# Altium PCB Main.PcbDoc
Units mil, origin at the board's own origin, x right, y up, seen from the top; angles counter-clockwise.
Board outline 2306.85 x 2461.6 mil, 2 copper layers (Top Layer, Bottom Layer); 62 components, 47 nets, 276 pads, 49 vias.
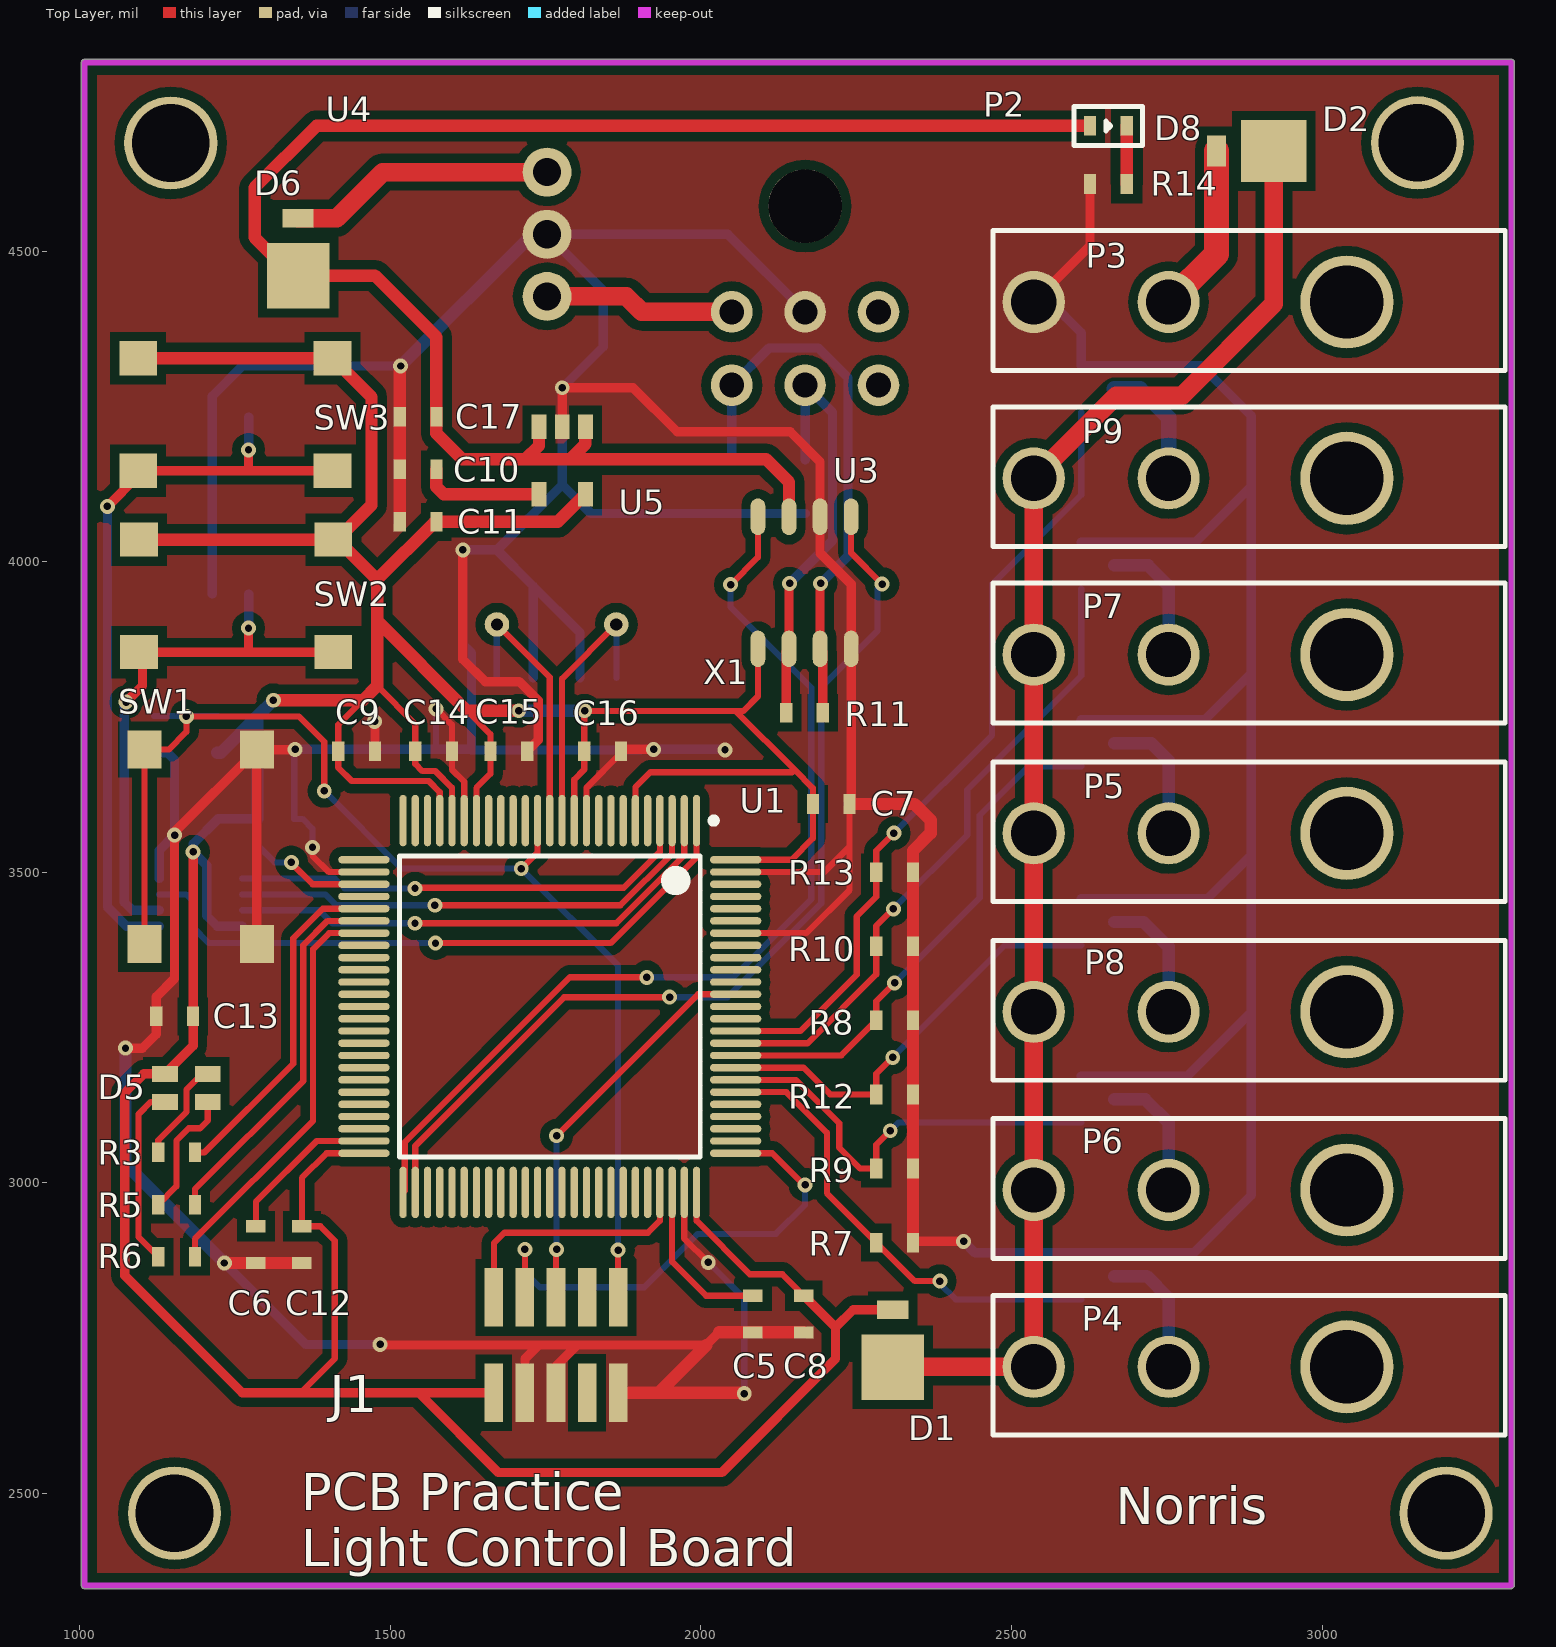
[diagram p0: Top Layer view]
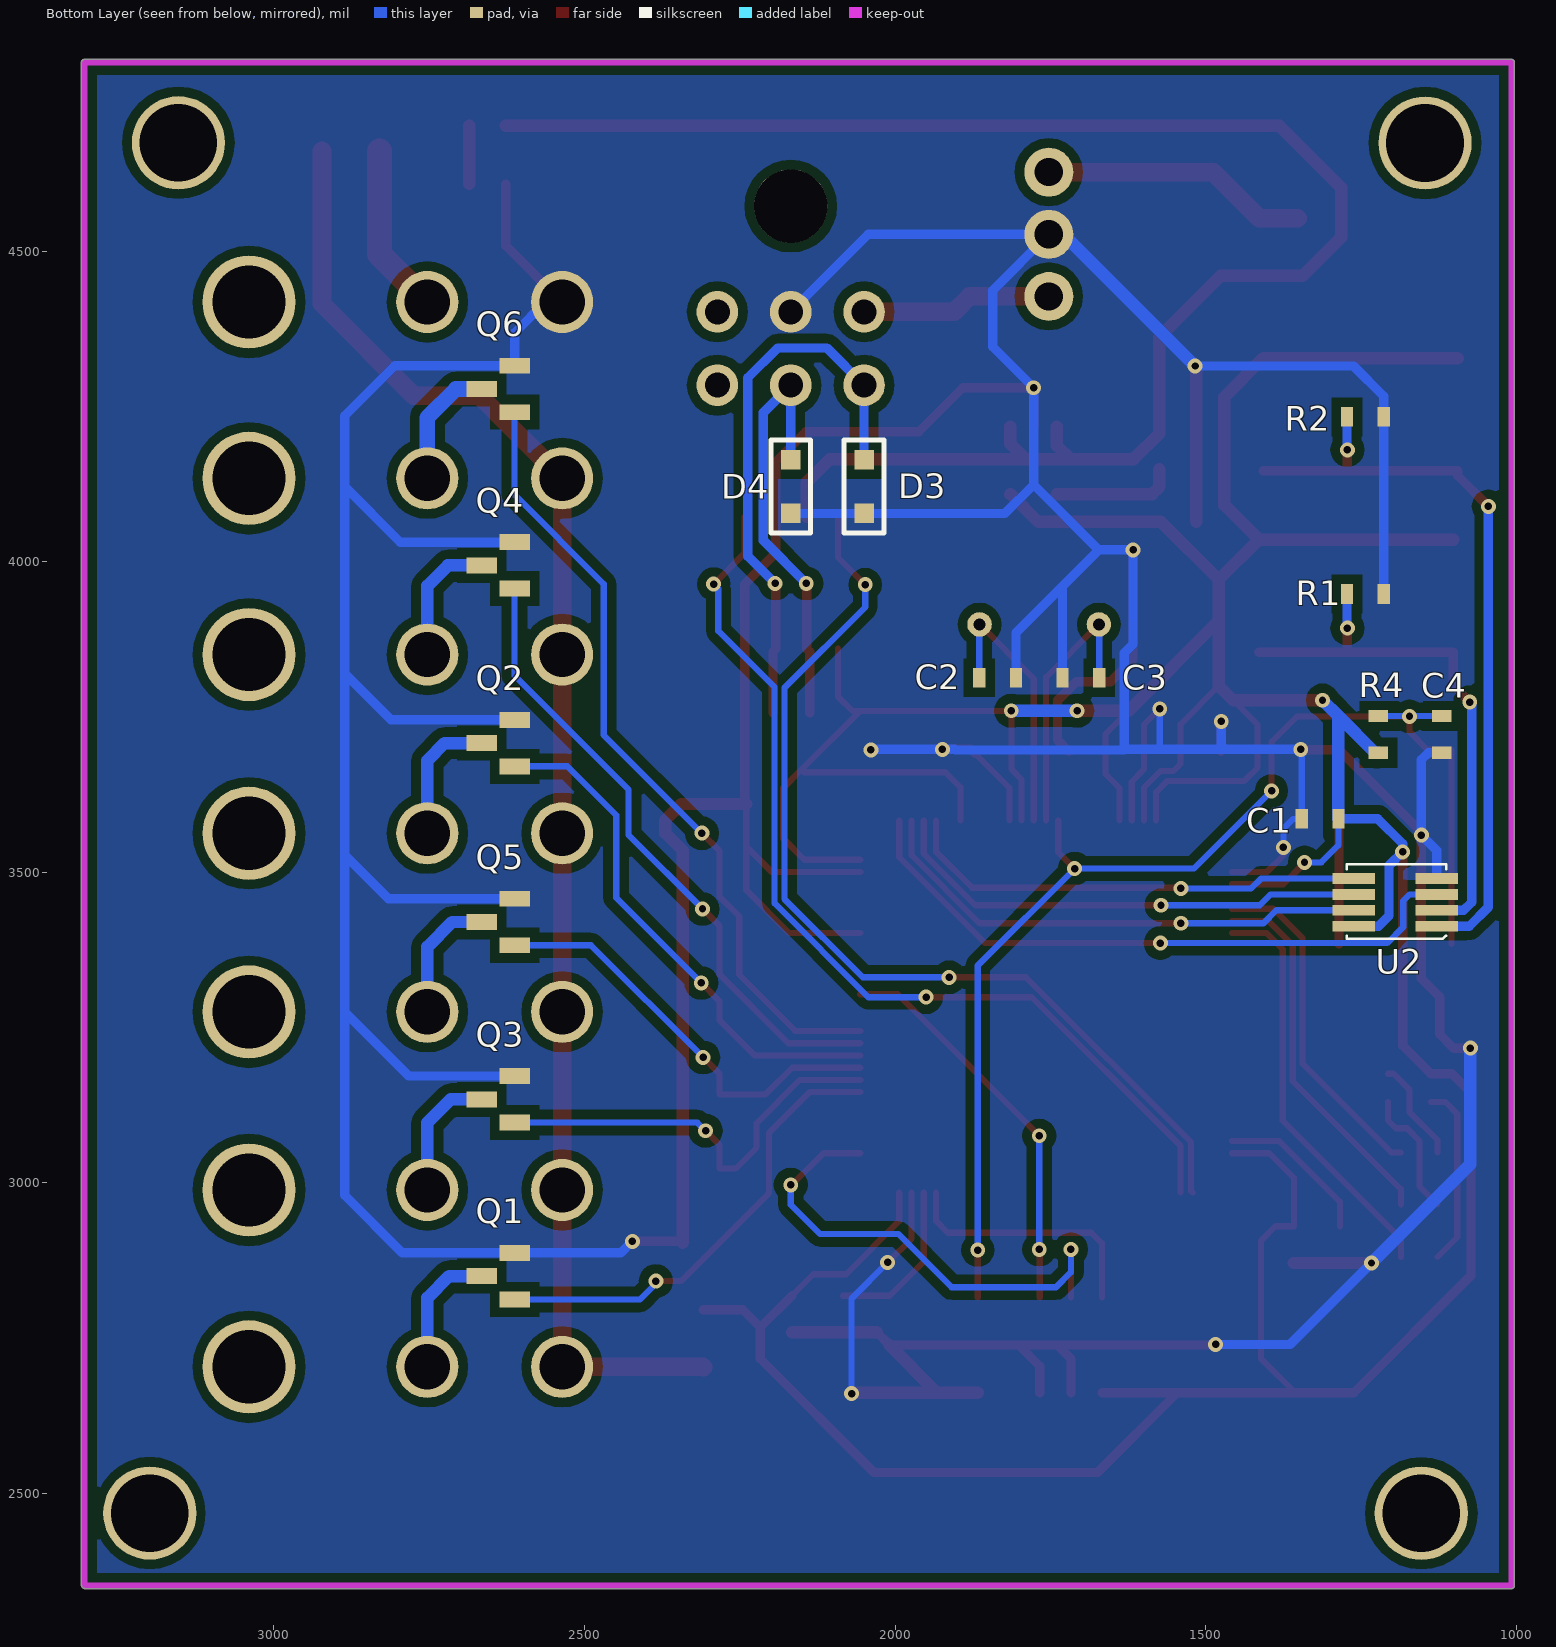
[diagram p1: Bottom Layer view, seen from below]

## Layer stack, top to bottom
Top Solder: solder mask 0.4, Solder Resist, Dk 3.5
Top Layer: signal copper 1.4
Dielectric 1: dielectric 12.6, FR-4, Dk 4.8
Bottom Layer: signal copper 1.4
Bottom Solder: solder mask 0.4, Solder Resist, Dk 3.5

## Board outline
1008,2346.97 cw(c1008,2351.99) 1003.01,2352.49 cw(c1008,2353) 1002.99,2353 1002.99,4803.56 cw(c1008,4803.56) 1008,4808.58 3304.82,4808.58 cw(c3304.82,4803.56) 3309.84,4803.56 3309.84,2352.82 cw(c3304.82,2352.82) 3307.93,2348.88 cw(c3303.99,2351.99) 3303.99,2346.97

## Design rules (kind name [scope] priority, off if disabled: settings)
Clearance [All] p1: gap=6 ignorepadtopadclearanceinfootprint=FALSE
DiffPairsRouting [All] p1: maxlimit=10 minlimit=10 mostfreqgap=10 toplayer_minwidth=15 toplayer_maxwidth=15 toplayer_prefwidth=15 bottomlayer_minwidth=15 bottomlayer_maxwidth=15 bottomlayer_prefwidth=15 maxuncoupledlength=500
PlaneConnect [All] p1: planeconnectstyle=Direct reliefexpansion=20 reliefentries=4 reliefconductorwidth=10 reliefairgap=10
PolygonConnect [All] p1: connectstyle=Direct reliefconductorwidth=10 reliefentries=4 polygonreliefangle="90 Angle" airgapwidth=10
RoutingVias [All] p1: holewidth=12 width=24 viastyle="Through Hole" minholewidth=10 minwidth=20 maxholewidth=20 maxwidth=30
SolderMaskExpansion [All] p1: expansion=4
Width [All] p1: maxlimit=40 minlimit=6 preferedwidth=10
28 further rules are at their usual default settings.

## Classes and differential pairs
component class Connectors: D1 D2 D3 D4 J1 P2 P3 P4 P5 P6 P7 P8 P9
component class MCU: C1 C2 C3 C4 C5 C6 D5 R1 R2 R3 R4 R5 R6 SW1 SW2 SW3 U1 U2 X1
component class Other: Q1 Q2 Q3 Q4 Q5 Q6 R7 R8 R9 R10 R11 R12 R13 U3
component class Power: C7 C8 C9 C10 C11 C12 C13 C14 C15 C16 C17 D6 D8 R14 U4 U5
differential pair CAN2: +CAN2_P -CAN2_N

## Components (designator, comment, footprint, x,y, rotation, side; value= is the part's Value field where it differs from the comment)
C1 "SCH_GENERIC_CAPACITOR_0603" PCB_GENERIC_SMD_0603 1316,3586 r0 bottom
C2 "SCH_GENERIC_CAPACITOR_0603" PCB_GENERIC_SMD_0603 1835,3813 r0 bottom
C3 "SCH_GENERIC_CAPACITOR_0603" PCB_GENERIC_SMD_0603 1701,3813 r180 bottom
C4 "SCH_GENERIC_CAPACITOR_0603" PCB_GENERIC_SMD_0603 1120,3722 r270 bottom
C5 "SCH_GENERIC_CAPACITOR_0603" PCB_GENERIC_SMD_0603 2084,2789 r90 top
C6 "SCH_GENERIC_CAPACITOR_0603" PCB_GENERIC_SMD_0603 1284,2900.68 r90 top
C7 "C060-0001U-00" PCB_GENERIC_SMD_0603 2210,3610 r180 top value=0.33uF
C8 "C060-0001U-00" PCB_GENERIC_SMD_0603 2166,2789 r90 top value=0.33uF
C9 "C060-0001U-00" PCB_GENERIC_SMD_0603 1446,3695 r180 top value=0.33uF
C10 "C060-0001U-00" PCB_GENERIC_SMD_0603 1544.94,4148.57 r0 top value=10nF
C11 "C060-0001U-00" PCB_GENERIC_SMD_0603 1544.94,4064 r0 top value=10uF
C12 "C060-0001U-00" PCB_GENERIC_SMD_0603 1358,2900.68 r90 top value=0.33uF
C13 "C060-0001U-00" PCB_GENERIC_SMD_0603 1153,3268 r180 top value=1uF
C14 "C060-0001U-00" PCB_GENERIC_SMD_0603 1570,3695 r0 top value=1uF
C15 "C060-0001U-00" PCB_GENERIC_SMD_0603 1691,3695 r180 top value=0.33uF
C16 "C060-0001U-00" PCB_GENERIC_SMD_0603 1842,3695 r180 top value=0.33uF
C17 "C060-0001U-00" PCB_GENERIC_SMD_0603 1544.94,4233.15 r0 top value=0.1uF
D1 "Schottky Diode" "ON Semi Schottky Diode - MBRM110LT1G" 2309,2731 r90 top
D2 "Schottky Diode" "ON Semi Schottky Diode - MBRM110LT1G" 2895,4661 r180 top
D3 "TVS Diode" "TVS Diode" 2050,4121 r180 bottom
D4 "TVS Diode" "TVS Diode" 2168,4121 r180 bottom
D5 "D0S4-000CR-00" CLMVB-FKA 1172,3153 r0 top
D6 "Schottky Diode" "ON Semi Schottky Diode - MBRM110LT1G" 1352,4488 r90 top
D8 "Red LED" SMD_0603_LED 2656,4703.32 r0 top
J1 "SMT, shrouded" CONN-50mil-10POS-SMD 1767,2739 r90 top
P2 "SCH_MLX_MICROFIT_3X2" PCB_MLX_MICROFIT_3X2 2168,4501.01 r0 top
P3 "Molex Mini-Fit 1x2" "Molex Mini-Fit Jr 2x1" 3040,4418 r90 top
P4 "Molex Mini-Fit 1x2" "Molex Mini-Fit Jr 2x1" 3040,2704 r90 top
P5 "Molex Mini-Fit 1x2" "Molex Mini-Fit Jr 2x1" 3040,3562.83 r90 top
P6 "Molex Mini-Fit 1x2" "Molex Mini-Fit Jr 2x1" 3040,2988.67 r90 top
P7 "Molex Mini-Fit 1x2" "Molex Mini-Fit Jr 2x1" 3040,3850.5 r90 top
P8 "Molex Mini-Fit 1x2" "Molex Mini-Fit Jr 2x1" 3040,3275.33 r90 top
P9 "Molex Mini-Fit 1x2" "Molex Mini-Fit Jr 2x1" 3040,4134.17 r90 top
Q1 "NMOS" "NMOS - SSM3K333R - SOTFL95P180X88-3M" 2639,2850 r0 bottom
Q2 "NMOS" "NMOS - SSM3K333R - SOTFL95P180X88-3M" 2639,3708 r0 bottom
Q3 "NMOS" "NMOS - SSM3K333R - SOTFL95P180X88-3M" 2639,3134.6 r0 bottom
Q4 "NMOS" "NMOS - SSM3K333R - SOTFL95P180X88-3M" 2639,3994 r0 bottom
Q5 "NMOS" "NMOS - SSM3K333R - SOTFL95P180X88-3M" 2639,3420 r0 bottom
Q6 "NMOS" "NMOS - SSM3K333R - SOTFL95P180X88-3M" 2639,4278 r0 bottom
R1 "SCH_GENERIC_RESISTOR_0603" PCB_GENERIC_SMD_0603 1243,3948 r0 bottom
R2 "SCH_GENERIC_RESISTOR_0603" PCB_GENERIC_SMD_0603 1243,4233 r180 bottom
R3 "SCH_GENERIC_RESISTOR_0603" PCB_GENERIC_SMD_0603 1156.32,3049.21 r180 top
R4 "SCH_GENERIC_RESISTOR_0603" PCB_GENERIC_SMD_0603 1222,3722 r270 bottom
R5 "SCH_GENERIC_RESISTOR_0603" PCB_GENERIC_SMD_0603 1156.32,2965.11 r180 top
R6 "SCH_GENERIC_RESISTOR_0603" PCB_GENERIC_SMD_0603 1156.32,2881 r180 top
R7 "SCH_GENERIC_RESISTOR_0603" PCB_GENERIC_SMD_0603 2312.16,2904 r0 top
R8 "SCH_GENERIC_RESISTOR_0603" PCB_GENERIC_SMD_0603 2312.16,3261.6 r0 top
R9 "SCH_GENERIC_RESISTOR_0603" PCB_GENERIC_SMD_0603 2312.16,3023.2 r0 top
R10 "SCH_GENERIC_RESISTOR_0603" PCB_GENERIC_SMD_0603 2312.16,3380.8 r0 top
R11 "SCH_GENERIC_RESISTOR_0603" PCB_GENERIC_SMD_0603 2167,3757 r0 top
R12 "SCH_GENERIC_RESISTOR_0603" PCB_GENERIC_SMD_0603 2312.16,3142.4 r0 top
R13 "SCH_GENERIC_RESISTOR_0603" PCB_GENERIC_SMD_0603 2312.16,3500 r0 top
R14 "SCH_GENERIC_RESISTOR_0603" PCB_GENERIC_SMD_0603 2656,4608 r180 top
SW1 "Tactile Switch" "C&K 4 pin Tactile Switch" 1195,3541 r90 top
SW2 "Tactile Switch" "C&K 4 pin Tactile Switch" 1252,3945 r0 top
SW3 "Tactile Switch" "C&K 4 pin Tactile Switch" 1251,4237 r180 top
U1 "STM32F407VGT6" STM-LQFP100_M 1757,3284 r270 top
U2 "SN74LVC1G139" demux_24 1128.14,3413.23 r0 bottom
U3 "SN65HVD1050DR" SOIC127P600X175-8N 2167,3966 r270 top
U4 "R78E-1.0 DC/DC" R78-1.0 1664,4527 r90 top
U5 "3.3V LDO" SOT95P280X145-5N 1777,4163 r270 top
X1 "XTAL" CRYSTAL_8MHZ 1768,3899 r180 top

## Footprints (in the part's own frame and the unit in brackets; to place one, negate y for a bottom-side part, rotate by r counter-clockwise, add the part's x,y. Pads: shape width x height; smd on the part's side, far side on the other; paste and mask are expansions set on the pad)
"C&K 4 pin Tactile Switch" [mm] "4 Pin Tactile Switch, SMT"
  rect 1.55x1.4 smd mask+0.1: 1(-3.975,2.3)
  rect 1.55x1.4 smd: 2(3.975,2.3) 3(-3.975,-2.3) 4(3.975,-2.3)
  body extent -4.47,-3.02 4.53,2.98, height 5
CLMVB-FKA [mm] "LED RGB DIFFUSED 4SMD"
  rect 1.05x0.65 smd: 1(-0.875,0.575) 2(0.875,0.575) 3(0.875,-0.575) 4(-0.875,-0.575)
  body extent -1,-1 1,1, height 1
CONN-50mil-10POS-SMD [mm] "50mil 10POS 2ROW SMT HEADER"
  rect 2.4x0.76 smd: 1(-1.95,2.54) 2(1.95,2.54) 3(-1.95,1.27) 4(1.95,1.27) 5(-1.95,0) 6(1.95,0) 7(-1.95,-1.27) 8(1.95,-1.27) 9(-1.95,-2.54) 10(1.95,-2.54)
  body extent -2.75,-6.33 2.75,6.32, height 5.57
CRYSTAL_8MHZ [mm] "631-1100-ND"
  round 1 hole 0.5: 1(-2.44,0) 2(2.44,0)
  body extent -5.75,-2.5 5.75,2.5, height 3.55
demux_24 [mm] "SN74LVC1G139DCTR"
  rect 1.74x0.44 smd: 1(0,0) 2(0,-0.65) 3(0,-1.3) 4(0,-1.95) 5(3.4,-1.95) 6(3.4,-1.3) 7(3.4,-0.65) 8(3.4,0)
  silkscreen extent -0.38,-2.54 3.68,0.51, body extent -0.36,-2.49 3.66,0.46, height 0.91
"Molex Mini-Fit Jr 2x1" [mil]
  round 100 hole 73: 1(0,287) 2(0,504)
  round 150 hole 118: ""(0,0)
  silkscreen extent -110,-255 115,570, body extent -111,-260 117,525, height 449
"NMOS - SSM3K333R - SOTFL95P180X88-3M" [mm] "SOTFL, 3-Leads, Body 2.90x1.80mm, Pitch 0.95mm, IPC Low Density"
  rect 1.25x0.65 smd: 1(-0.675,0.95) 2(-0.675,-0.95) 3(0.675,0)
  body extent -0.95,-1.55 0.95,1.55, height 0.88
"ON Semi Schottky Diode - MBRM110LT1G" [mil]
  rect 105.12x100 smd: 1(-27.56,0)
  rect 30x50 smd: 2(64.94,0)
  body extent -78,-65 37,65, height 40
PCB_GENERIC_SMD_0603 [mm]
  rect 0.5x0.8 smd: 1(-0.75,0) 2(0.75,0)
  body extent -0.75,-0.5 0.75,0.5, height 0.45
PCB_MLX_MICROFIT_3X2 [mm]
  round 1.7 hole 1.02: 1(-3,-2.51) 2(0,-2.51) 3(3,-2.51) 4(-3,-5.51) 5(0,-5.51) 6(3,-5.51)
  round 3 hole 3 unplated: ""(0,1.81)
  body extent -6.58,-5.78 6.57,6.46, height 8.83
R78-1.0 [mm]
  round 2 hole 1.15: 1(-2.54,-2.25) 2(0,-2.25) 3(2.54,-2.25)
  body extent -5.8,-4.25 5.8,4.25, height 10.4
SMD_0603_LED [mm]
  rect 0.5x0.8 smd: 1(-0.747,-0.047) 2(0.753,-0.047)
  silkscreen extent -1.4,-0.85 1.4,0.75, body extent -0.75,-0.55 0.75,0.45, height 0.45
SOIC127P600X175-8N [mm] "SOIC, 8-Leads, Body 4.90x3.90mm, Pitch 1.27mm, IPC Medium Density"
  oval 1.5x0.6 smd: 1(-2.7,1.905) 2(-2.7,0.635) 3(-2.7,-0.635) 4(-2.7,-1.905) 5(2.7,-1.905) 6(2.7,-0.635) 7(2.7,0.635) 8(2.7,1.905)
  body extent -3,-2.45 3,2.45, height 1.75
SOT95P280X145-5N [mm] "SOT23, 5-Leads, Body 2.90x2.80mm, Pitch 0.95mm, IPC Medium Density"
  rect 1x0.6 smd: 1(-1.375,0.95) 2(-1.375,0) 3(-1.375,-0.95) 4(1.375,-0.95) 5(1.375,0.95)
  body extent -1.5,-1.53 1.5,1.53, height 1.45
STM-LQFP100_M [mm] "Thin QFP, 100-Leads, Body 14x14mm, Pitch 0.5mm, IPC Low Density"
  oval 2.1x0.3 smd: 1(-7.6,6) 2(-7.6,5.5) 3(-7.6,5) 4(-7.6,4.5) 5(-7.6,4) 6(-7.6,3.5) 7(-7.6,3) 8(-7.6,2.5) 9(-7.6,2) 10(-7.6,1.5) 11(-7.6,1) 12(-7.6,0.5) 13(-7.6,0) 14(-7.6,-0.5) 15(-7.6,-1) 16(-7.6,-1.5) 17(-7.6,-2) 18(-7.6,-2.5) 19(-7.6,-3) 20(-7.6,-3.5) 21(-7.6,-4) 22(-7.6,-4.5) 23(-7.6,-5) 24(-7.6,-5.5) 25(-7.6,-6) 51(7.6,-6) 52(7.6,-5.5) 53(7.6,-5) 54(7.6,-4.5) 55(7.6,-4) 56(7.6,-3.5) 57(7.6,-3) 58(7.6,-2.5) 59(7.6,-2) 60(7.6,-1.5) 61(7.6,-1) 62(7.6,-0.5) 63(7.6,0) 64(7.6,0.5) 65(7.6,1) 66(7.6,1.5) 67(7.6,2) 68(7.6,2.5) 69(7.6,3) 70(7.6,3.5) 71(7.6,4) 72(7.6,4.5) 73(7.6,5) 74(7.6,5.5) 75(7.6,6)
  oval 0.3x2.1 smd: 26(-6,-7.6) 27(-5.5,-7.6) 28(-5,-7.6) 29(-4.5,-7.6) 30(-4,-7.6) 31(-3.5,-7.6) 32(-3,-7.6) 33(-2.5,-7.6) 34(-2,-7.6) 35(-1.5,-7.6) 36(-1,-7.6) 37(-0.5,-7.6) 38(0,-7.6) 39(0.5,-7.6) 40(1,-7.6) 41(1.5,-7.6) 42(2,-7.6) 43(2.5,-7.6) 44(3,-7.6) 45(3.5,-7.6) 46(4,-7.6) 47(4.5,-7.6) 48(5,-7.6) 49(5.5,-7.6) 50(6,-7.6) 76(6,7.6) 77(5.5,7.6) 78(5,7.6) 79(4.5,7.6) 80(4,7.6) 81(3.5,7.6) 82(3,7.6) 83(2.5,7.6) 84(2,7.6) 85(1.5,7.6) 86(1,7.6) 87(0.5,7.6) 88(0,7.6) 89(-0.5,7.6) 90(-1,7.6) 91(-1.5,7.6) 92(-2,7.6) 93(-2.5,7.6) 94(-3,7.6) 95(-3.5,7.6) 96(-4,7.6) 97(-4.5,7.6) 98(-5,7.6) 99(-5.5,7.6) 100(-6,7.6)
  silkscreen extent -7.72,-6.15 6.15,6.83, body extent -7,-7 7,7, height 1.6
"TVS Diode" [mm] "Digikey: CDSOD323-T03SCCT-ND MFG:    CDSOD323-T03SC"
  rect 0.8x0.8 smd: 1(0,1.1) 2(0,-1.1)
  silkscreen extent -0.81,-1.91 0.81,1.91, body extent -0.65,-1.27 0.65,1.27, height 1.04

## Part data
C1: "Generic SMD capacitor 0603", Capacitance=0.1uF, Tolerance=*%, Voltage=*V
C2 C3: "Generic SMD capacitor 0603", Capacitance=30pF, Tolerance=*%
C4: "Generic SMD capacitor 0603", Capacitance=100nF, Tolerance=*%
C5 C6: "Generic SMD capacitor 0603", Capacitance=2.2uF, Tolerance=*%
C7 C8 C9 C10 C11 C12 C13 C14 C15 C16 C17: "CAP CER 0603 1uF 16V X5R 20%", Package=0603, Tolerance=20%, Voltage=16V
D1 D2 D6: library part "ON Semi Schottky Diode - MBRM110LT1G"
D3 D4: Manufacturer=Bourns, Manufacturer ID=CDSOD323-T03SC
D5: "LED 4SMD RGB 2Vf 3Vf 3Vf 20mA 10mA 10mA", Color=RGB, Supplier Part Number 1=CLMVB-FKA-CFHEHLCBB7A363CT-ND, Supplier 1=Digi-Key
D8: library part SMD_0603_LED
J1: library part "conn_0.050\"_cortexM", "ARM Cortex-M 10pin connector,shrouded,SMT", Supplier Part Number 1=1175-1629-ND, Supplier 1=Digi-Key
Q1 Q2 Q3 Q4 Q5 Q6: library part "NMOS - SSM3K333R"
R1 R2: "Generic SMD resistor 0603", Resistance=10K
R3 R5: "Generic SMD resistor 0603", Resistance=30R
R4 R7 R8 R9 R10 R12 R13: "Generic SMD resistor 0603", Resistance=100K
R6: "Generic SMD resistor 0603", Resistance=140R
R11: "Generic SMD resistor 0603", Resistance=120R
R14: "Generic SMD resistor 0603", Resistance=330R
SW1 SW2 SW3: library part "C&K Tactile Switch", Supplier Part Number 1=CKN9085CT-ND, Supplier 1=Digi-Key
U1: "ARM Cortex-M4 32-bit MCU+FPU, 210 DMIPS, 1024 kB Flash, 192 kB Internal RAM, 82 I/Os, 100-pin LQFP, -40 to 85 degC, Tray", I/Os (High Current)=82, Manufacturer=STMicroelectronics, Operating Frequency(F) (Processor speed) (MHz)=168, Supplier Part Number 1=497-11605-ND, Supply Voltage(Vcc) max (V)=3.6, Supply Voltage(Vcc) min (V)=1.8, ComponentLink1Description="Manufacturer URL", ComponentLink1URL=http://www.st.com/web/en/home.html, ComponentLink2Description=Datasheet, ComponentLink2URL=http://www.st.com/st-web-ui/static/active/en/resource/technical/document/datasheet/DM00037051.pdf, ComponentLink3Description="Package Specification", ComponentLink3URL=http://www.st.com/st-web-ui/static/active/en/resource/technical/document/data_brief/DM00071938.pdf, Core="ARM Cortex-M4", D/A Converter=2x12-bit, DatasheetVersion="Rev. 4", FLASH Size (Prog) (kB)=1024, Internal RAM Size (kB)=192, Mounting Technology="Surface Mount", PackageDescription="100-Pin Low Profile Quad Flat Package, 14 x 14 mm Body, 0.5 mm Pitch", PackageReference=LQFP100, PackageVersion="Rev. 1, 06/2013", Packing=Tray, PartNumber=STM32F407VGT6, Supplier 1=Digi-Key, Supplier 2=Farnell, Supplier 3=Newark, Supplier 4=Mouser, Supplier Part Number 2=2064368, Supplier Part Number 3=73T2333, Supplier Part Number 4=511-STM32F407VGT6
U2: library part demux_24
U3: "IC EMC CAN TRANSCEIVER 8-SOIC", Supplier Part Number 1=296-26335-1-ND, Supplier 1=Digi-Key
U4: library part R78E-1.0
U5: library part 3V3LDO_TPS73633DBVR_SOT23-5, "Linear Voltage Regulator IC Positive Fixed 1 Output 3.3V 400mA SOT-23-5"
X1: library part Crystal, Frequency=8MHz

## Free pads (board coordinates)
  round 150 hole 125: ""(1146.96,4673.99) ""(1152.96,2468.3) ""(3153.73,4674.28) ""(3199.73,2468.59)

## Via types
v1: diameter 24, hole 12, Top Layer to Bottom Layer, 49 vias

## Nets (pads, with @x,y where several pads share a name; then routed paths per layer and width w, separated by ;. In a path a pad name is that pad's centre, name@x,y a point inside that pad or via, vN(x,y) a via of type N, cw(c..) or ccw(c..) an arc to the next point about the centre after c; other vN are vias at no path point)
3V3: C1.1 C7.2 C8.2 C9.2 C11.2 C12.2 C13.1 C14.1 C15.2 C16.2 D1.2 D5.1 J1.1 R4.2 SW2.1 SW2.2 SW3.3 SW3.4 U1.6 U1.11 U1.19 U1.21 U1.22 U1.28 U1.50 U1.75 U1.100 U2.8 U3.5 U5.5 | length 8367.2
  Top Layer w10: v1(1341,3516) 1341,3515 1375.15,3480.85 U1.28 ; 1356,2662.23 1411,2717.23 1411,2907 1387.79,2930.21 C12.2 1358,3008 1397.78,3047.78 U1.50 ; 1456,3777 1416.47,3737.47 C9.2 1416.47,3668.53 1438,3647 1562,3647 1579.83,3629.17 U1.22 ; 1479,3800 1540.47,3738.53 C14.1 1540.47,3674.53 1552,3663 1573,3663 1599.52,3636.48 U1.21 ; 1624,3760 1661.47,3722.53 C15.2 1661.47,3658.47 1638.89,3635.89 U1.19 ; U1.11 1796.37,3649.37 1812.47,3665.47 C16.2 1812.47,3759.47 2056.53,3759.47 ; U1.6 1894.8,3636.8 1919,3661 2147,3661 2151,3665 ; U1.75 1993.22,2938.78 2079,2853 2131.53,2853 C8.2 ; U1.100 2146.22,3520.22 2180.47,3554.47 C7.2 2180.47,3635.53 2151,3665 ; U3.5 2092,3783 2068.47,3759.47 2056.53,3759.47 ; 2056.53,3759.47 2151,3665
  Top Layer w15: v1(1183,3533) 1183,3221.09 D5.1 1103.64,3175.64 1073,3145 1073,2851 1261.77,2662.23 1356,2662.23 1546,2662.23 ; J1.1 1546,2662.23 ; C8.2 2217,2767.53 ; D1.2 2245.41,2795.94 2217,2767.53 ; 1546,2662.23 1674.23,2534 2034,2534 2217,2717 2217,2767.53
  Top Layer w20: SW3.4 SW3.3 1470,4265.05 1470,4091.06 SW2.2@1414.5,4035.55 ; SW2.1@1101.5,4035.55 SW2.2 SW2.2@1414.5,4035.55 ; v1(1312,3777) 1456,3777 1479,3800 1479,3905 ; v1(1707,3760) 1624,3760 1479,3905 ; U5.5 1769.54,4064 C11.2 1571.95,4064 1479,3971.05 ; SW2.2@1414.5,4035.55 1479,3971.05 ; 1479,3905 1479,3971.05
  Bottom Layer w10: C1.1 1286.47,3543.53 1314,3516 v1(1341,3516)
  Bottom Layer w15: U2.8 1221.77,3413.23 1205,3430 1205,3511 v1(1183,3533) 1183,3546 1223,3586 C1.1
  Bottom Layer w20: R4.2 1227.47,3692.47 1286.47,3751.47 ; C1.1 1286.47,3751.47 ; v1(1312,3777) 1286.47,3751.47 ; v1(1707,3760) v1(1813,3760)
5V: C17.2 D6.1 D8.1 U3.3 U5.1 U5.3 | length 2758.8
  Top Layer w20: U5.3 1739.6,4186.6 1718,4165 ; U5.1 1814.4,4189.4 1790,4165 ; U3.3 2142,4128 2105,4165 1790,4165 ; D8.1 1381.47,4701.47 1282,4602 1282,4522 1343.56,4460.44 D6.1 1475.56,4460.44 1574.47,4361.53 C17.2 1574.47,4206.53 1616,4165 1718,4165 ; 1718,4165 1790,4165
"5V - DCDC": D6.2 U4.3 | length 431.3
  Top Layer w30: D6.2 1413.94,4552.94 1488,4627 U4.3
12V: P2.1 U4.1 | length 307.6
  Top Layer w30: U4.1 1880.2,4427 1905,4402.2 P2.1
"12V - Power": D2.2 P3.1 | length 274.9
  Top Layer w40: P3.1 2830.06,4495.06 D2.2
BE: Q5.1 R12.1 U1.83 | length 693.1
  Top Layer w10: U1.83 2165.43,3185.57 2208.6,3142.4 R12.1 2282.63,3175.63 v1(2309,3202)
  Bottom Layer w10: v1(2309,3202) 2489.6,3382.6 Q5.1
BLUE_LED: R3.1 U1.30 | length 552.8
  Top Layer w10: R3.1 1201.21,3049.21 1344,3192 1344,3394 1391.48,3441.48 U1.30
Brake: P8.1 Q5.3 | length 208.7
  Bottom Layer w20: Q5.3 2713,3420 2753,3380 P8.1
CAN2_N: D4.1 P2.5 R11.1 U3.6 | length 696
  Top Layer w15: R11.1 2137.47,3855.17 U3.6 2142,3964 v1(2143,3965)
  Bottom Layer w15: v1(2143,3965) 2212,4034 2212,4240.09 P2.5 D4.1
CAN2_P: D3.1 P2.4 R11.2 U3.7 | length 914.3
  Top Layer w15: v1@2193,3968 2192,3967 U3.7 2196.53,3855.17 R11.2
  Bottom Layer w15: D3.1@2049.89,4164.42 D3.1 2050,4283.98 P2.4 2109.8,4344 2189,4344 2237,4296 2237,4009 v1(2193,3965)
CAN2_RX: U1.51 U3.4 | length 1585.7
  Top Layer w10: U1.51 1523.56,2987.57 1523.56,3065.19 1789.37,3331 v1(1913,3331) ; v1(2048,3963) 2092,4007 U3.4
  Bottom Layer w10: v1(1913,3331) 2052,3331 2178,3457 2178,3797 2048,3927 v1(2048,3963)
CAN2_TX: U1.52 U3.1 | length 1573.6
  Top Layer w10: U1.52 1540.46,3059.46 1780,3299 v1(1950,3299) ; U3.1 2242,4014 v1(2292,3964)
  Bottom Layer w10: v1(1950,3299) 2043,3299 2194,3450 2194,3798 2284.5,3888.5 2284.5,3956.5 v1(2292,3964)
"Emergency Strobe": P9.1 Q6.3 | length 204.3
  Bottom Layer w25: Q6.3 2707,4278 2753,4232 P9.1
ES: Q6.1 R13.1 U1.86 | length 1287.5
  Top Layer w10: U1.86 2160.63,3244.63 2251,3335 2251,3429 2282.63,3460.63 R13.1 2282.63,3534.63 v1(2311,3563)
  Bottom Layer w10: v1(2311,3563) 2469,3721 2469,3964 2612.43,4107.43 Q6.1
GND: C1.2 C2.1 C3.1 C4.2 C5.1 C6.1 C7.1 C8.1 C9.1 C10.1 C11.1 C12.1 C13.2 C14.2 C15.1 C16.1 C17.1 D3.2 D4.2 J1.3 J1.5 J1.9 P2.2 P3.2 Q1.2 Q2.2 Q3.2 Q4.2 Q5.2 Q6.2 R1.1 R2.2 R7.2 R8.2 R9.2 R10.2 R12.2 R13.2 R14.2 SW1.3 SW1.4 U1.10 U1.20 U1.27 U1.74 U1.94 U1.99 U2.4 U3.2 U3.8 U4.2 U5.2 | length 15281.3
  Top Layer w10: v1(1375,3540) 1375,3527 1401.46,3500.54 U1.27 ; v1(1574,3763) 1599.53,3737.47 C14.2 1599.53,3665.47 1619.2,3645.8 U1.20 ; U1.10 1816.06,3636.06 C16.1@1871.53,3691.53 ; U1.74 1973.54,2910.46 v1(2012,2872) ; U1.94 2170.11,3402.11 2239.53,3471.53 2239.53,3541.53 ; U1.99 2198.54,3500.54 2239.53,3541.53 ; C7.1 2239.53,3541.53
  Top Layer w15: v1(1074,3217) 1101,3217 1123.47,3239.47 C13.2 1123.47,3299.47 1153,3329 v1(1153,3560) 1153,3564.94 SW1.4 ; SW1.3 SW1.4 ; v1(1347,3698) 1346.5,3697.5 SW1.4 ; v1(1475,3743) 1475.53,3742.47 C9.1 C9.1@1478.53,3698 ; v1(1484,2740) 1485,2739 1739,2739 ; v1(1617,4019) 1617,3843 1653,3807 1708,3807 1738.5,3776.5 1738.5,3712.97 C15.1 ; J1.3 1717,2717 1739,2739 ; J1.5 1767,2705 1801,2739 ; U5.2 v1(1777,4280) 1891,4280 1962,4209 2144,4209 2192,4161 U3.2 2192,4014 2242,3964 U3.8 2242,3612.47 C7.1 ; C16.1@1871.53,3691.53 1878,3698 v1(1924,3698) ; 2029.47,2759.47 2009,2739 1801,2739 ; R7.2 2343.69,2906 v1(2423,2906) ; P3.2 2626.47,4508.47 R14.2 ; 1739,2739 1801,2739
  Top Layer w20: v1(1233.16,2871.16) C6.1 C12.1 ; C11.1 1515.42,4233.15 1515.42,4313.42 v1(1517,4315) ; J1.9 1932.23,2662.23 ; 2009,2739 1932.23,2662.23 ; 2029.47,2759.47 C5.1 C8.1 ; v1(2070,2661) 2068.77,2662.23 1932.23,2662.23 ; C7.1 2344,3610 2370,3584 2370,3563 2341.69,3534.69 R13.2 R10.2 R8.2 R12.2 R9.2 R7.2
  Bottom Layer w10: v1(1347,3698) 1345.53,3696.53 C1.2 1359,3586 1375,3570 v1(1375,3540) ; 1574,3698 v1(1574,3763) ; v1(2012,2872) 2070,2814 v1(2070,2661) v1@2070,2656
  Bottom Layer w15: C4.2 1141.53,3692.47 1153,3681 v1(1153,3560) 1128.14,3535.14 U2.4 ; R1.1 R2.2 1213.47,4266.47 1262,4315 v1(1517,4315) ; v1(1233.16,2871.16) 1364.31,2740 v1(1484,2740) ; v1(1347,3698) 1469,3698 ; v1(1475,3743) 1475,3704 1469,3698 ; C3.1 1730.53,3960.47 ; C2.1 1805.47,3885.53 1730.53,3960.47 ; v1(2039,3697) 2038,3698 v1(1924,3698) 1904,3698 1903,3697 1631,3697 ; D4.2 D3.2 1823.31,4077.69 1777,4124 ; P2.2 2043.2,4527 U4.2 1843,4436.58 1843,4346 v1(1777,4280) 1777,4124 ; v1(2423,2906) 2441.6,2887.4 Q1.2 2793.4,2887.4 2886,2980 2886,3275 ; P3.2 2563,4418 2612.43,4368.57 Q6.2 2805.6,4315.4 2886,4235 2886,4121 ; Q3.2 2783,3172 2886,3275 ; Q5.2 2815.4,3457.4 2886,3528 ; Q2.2 2811.4,3745.4 2886,3820 ; Q4.2 2796.4,4031.4 2886,4121 ; 1469,3698 1574,3698 1630,3698 1631,3697 ; 1631,3697 1631,3853 1617,3867 v1(1617,4019) 1672,4019 ; 1672,4019 1777,4124 ; 1672,4019 1730.53,3960.47 ; 2886,3275 2886,3528 ; 2886,3528 2886,3820 ; 2886,3820 2886,4121
  Bottom Layer w20: v1(1074,3217) 1074,3030.31 v1(1233.16,2871.16) ; v1(1517,4315) 1729,4527 U4.2
GREEN_LED: R5.1 U1.31 | length 603.7
  Top Layer w10: R5.1 1185.84,2989.84 1360,3164 1360,3382.63 1399.17,3421.8 U1.31
"Headlights (High)": P5.1 Q2.3 | length 216.2
  Bottom Layer w20: Q2.3 2725,3708 2753,3680 P5.1
"Headlights (Low)": P7.1 Q4.3 | length 211.6
  Bottom Layer w20: Q4.3 2720,3994 2753,3961 P7.1
HHE: Q2.1 R8.1 U1.84 | length 845.1
  Top Layer w10: U1.84 2226.29,3205.26 R8.1 2282.63,3292.63 v1(2312,3322)
  Bottom Layer w10: v1(2312,3322) 2449,3459 2449,3592 2527.6,3670.6 Q2.1
HLE: Q4.1 R10.1 U1.85 | length 1029.8
  Top Layer w10: U1.85 2171.94,3224.94 2282.63,3335.63 R10.1 2282.63,3413.63 v1(2310,3441)
  Bottom Layer w10: v1(2310,3441) 2429,3560 2429,3633 2612.43,3816.43 Q4.1
"Left Signal": P6.1 Q3.3 | length 211.3
  Bottom Layer w20: Q3.3 2715.4,3134.6 2753,3097 P6.1
LSE: Q3.1 R9.1 U1.82 | length 691.3
  Top Layer w10: U1.82 2153.11,3165.89 2223,3096 2223,3057 2256.8,3023.2 R9.1 2282.63,3061.63 v1(2305,3084)
  Bottom Layer w10: v1(2305,3084) 2318.2,3097.2 Q3.1
NetC3_2: C3.2 U1.13 X1.2 | length 437.2
  Top Layer w10: X1.2 1757,3813.94 U1.13
  Bottom Layer w10: C3.2 1671.47,3898.53 X1.2
NetC5_2: C5.2 U1.73 | length 264.4
  Top Layer w10: U1.73 1953.85,2873.15 2008.47,2818.53 C5.2
NetC6_2: C6.2 U1.49 | length 253.9
  Top Layer w10: C6.2 1284,2970 1381.46,3067.46 U1.49
NetC10_2: C10.2 U5.4 | length 198
  Top Layer w20: C10.2 1574.47,4120.53 1586.13,4108.87 U5.4
NetD5_2: D5.2 R3.2 | length 164.6
  Top Layer w10: R3.2 1126.79,3068.79 1172,3114 1172,3150 1197.64,3175.64 D5.2
NetD5_3: D5.3 R5.2 | length 208.8
  Top Layer w10: R5.2 1156,2994.32 1156,3068 1176,3088 1194,3088 1206.45,3100.45 D5.3
NetD5_4: D5.4 R6.2 | length 293.7
  Top Layer w10: R6.2 1095,2912.79 1095,3111 1114.36,3130.36 D5.4
NetD8_2: D8.2 R14.1 | length 93.5
  Top Layer w20: R14.1 2685.65,4608.12 D8.2
NetR1_2: R1.2 SW2.3 SW2.4 U2.2 | length 883.9
  Top Layer w15: v1(1075,3774) 1101.5,3800.5 1101.5,3854.45 1274,3854.45 ; v1(1272,3893) 1272,3856.45 1274,3854.45 ; SW2.4@1414.5,3854.45 SW2.4 1274,3854.45
  Bottom Layer w15: v1(1075,3774) 1072,3771 1072,3452 1085.18,3438.82 U2.2 ; v1(1272,3893) 1272.53,3893.53 R1.2
NetR2_1: R2.1 SW3.1 SW3.2 U2.1 | length 1225.4
  Top Layer w15: v1(1045,4089) 1094.5,4138.5 SW3.2 1274,4146.45 ; v1(1272,4180) 1272,4148.45 1274,4146.45 ; SW3.1 1274,4146.45
  Bottom Layer w15: v1(1045,4089) 1045,3444 1075.77,3413.23 U2.1 ; v1(1272,4180) 1272,4177 1272.53,4177.53 R2.1
NRST: C4.1 J1.10 R4.1 SW1.1 SW1.2 U1.14 | length 2051.5
  Top Layer w10: SW1.1 SW1.2 1143.5,3697.5 1172,3726 v1(1172,3751) 1353,3751 1394,3710 v1(1394,3631) ; v1(1711,3506) 1737.32,3532.32 U1.14 ; J1.10 v1(1867,2892)
  Bottom Layer w10: C4.1 v1@1167,3751.53 ; v1@1167,3754 v1@1167,3751.53 ; R4.1 v1@1167,3751.53 ; v1(1394,3631) 1519,3506 v1(1711,3506) 1867,3350 v1(1867,2892)
RED_LED: R6.1 U1.32 | length 666.4
  Top Layer w10: R6.1 1185.84,2909.84 1376,3100 1376,3376 1402.11,3402.11 U1.32
"Right Signal": P4.1 Q1.3 | length 212.9
  Bottom Layer w20: Q1.3 2718,2850 2753,2815 P4.1
RSE: Q1.1 R7.1 U1.81 | length 753.8
  Top Layer w10: U1.81 2137.8,3146.2 2203,3081 2203,2983.63 R7.1 2344.63,2842 v1(2385,2842)
  Bottom Layer w10: v1(2385,2842) 2385,2838 2410.4,2812.6 Q1.1
SCLK: C2.2 U1.12 X1.1 | length 438.2
  Top Layer w10: U1.12 1776.69,3811.62 X1.1
  Bottom Layer w10: X1.1 1864.53,3898.53 C2.2
SWCLK: J1.4 U1.76 | length 793.1
  Top Layer w10: J1.4 v1(1717,2893) ; U1.76 2115.22,3047.78 v1@2166,2997
  Bottom Layer w10: v1(1717,2893) 1717,2856 1741,2832 1909,2832 1995,2918 2121,2918 2168,2965 v1(2168,2997)
SWDIO: J1.2 U1.72 | length 415
  Top Layer w10: J1.2 1667,2903 1684,2920 1915,2920 1934.17,2939.17 U1.72
SWO: J1.6 U1.89 | length 643.2
  Top Layer w10: J1.6 1767,2892 v1(1768,2893) ; v1(1768,3076) 1995.69,3303.69 U1.89
  Bottom Layer w10: v1(1768,2893) v1(1768,3076)
UART1_RX: U1.69
UART1_TX: U1.68
"Variable Output Voltage": D1.1 D2.1 P4.2 P5.2 P6.2 P7.2 P8.2 P9.2 | length 2406.3
  Top Layer w30: D1.1 2309.56,2704 P4.2 P6.2 P8.2 P5.2 P7.2 P9.2 2668.83,4267 2774.56,4267 2922.56,4415 D2.1
Y0: U1.2 U2.7 | length 821.4
  Top Layer w10: v1(1540,3418) 1864.25,3418 1973.54,3527.28 U1.2
  Bottom Layer w10: U2.7 1386.18,3438.82 1407,3418 v1(1540,3418)
Y1: U1.3 U2.6 | length 786.5
  Top Layer w10: v1(1572,3447) 1870.63,3447 1953.85,3530.22 U1.3
  Bottom Layer w10: U2.6 1395.59,3464.41 1413,3447 v1(1572,3447)
Y2: U1.4 U2.5 | length 753.3
  Top Layer w10: v1(1540,3474) 1541,3475 1876,3475 1934.17,3533.17 U1.4
  Bottom Layer w10: U2.5 1411,3490 1427,3474 v1(1540,3474)
Y3: U1.1 U2.3 | length 1038.3
  Top Layer w10: v1(1573,3386) 1854.88,3386 1993.22,3524.34 U1.1
  Bottom Layer w10: U2.3 1171.59,3464.41 1182,3454 1182,3412 1208,3386 v1(1573,3386)
pads on no net: J1.7 J1.8 P2. P2.3 P2.6 P3. P4. P5. P6. P7. P8. P9. U1.5 U1.7 U1.8 U1.9 U1.15 U1.16 U1.17 U1.18 U1.23 U1.24 U1.25 U1.26 U1.29 U1.33 U1.34 U1.35 U1.36 U1.37 U1.38 U1.39 U1.40 U1.41 U1.42 U1.43 U1.44 U1.45 U1.46 U1.47 U1.48 U1.53 U1.54 U1.55 U1.56 U1.57 U1.58 U1.59 U1.60 U1.61 U1.62 U1.63 U1.64 U1.65 U1.66 U1.67 U1.70 U1.71 U1.77 U1.78 U1.79 U1.80 U1.87 U1.88 U1.90 U1.91 U1.92 U1.93 U1.95 U1.96 U1.97 U1.98

## Polygon pours and split planes (outlines as drawn)
GND on Top Layer "Bottom Layer-No Net" (solid, pour order 6): 1008,2351.99 1008,4803.56 3304.82,4803.56 3303.99,4802.73 3303.99,2351.99
GND on Bottom Layer "Bottom Layer-No Net" (solid, pour order 8): 1008,4803.56 3304.82,4803.56 3303.99,4802.73 3303.99,2351.99 1009.01,2351.99 1008,2353

## Keep-outs
Keep-Out Layer:
  lines w10: 1008,2351.99 3303.99,2351.99 3304.82,2352.82 3304.82,4803.56 1008,4803.56 1008,2353

## Silkscreen, mask and mechanical layers (free items; w line width, h text height)
Top Overlay:
  text "Norris" at 2668,2451 h60
  text "PCB Practice  / Light Control Board" at 1357,2383 h60